# Altium PCB stm8_sensor.PcbDoc
Units mil, origin at the board's own origin, x right, y up, seen from the top; angles counter-clockwise.
Board outline 2362.2 x 2362.2 mil, 2 copper layers (Top Layer, Bottom Layer); 53 components, 30 nets, 149 pads, 40 vias.
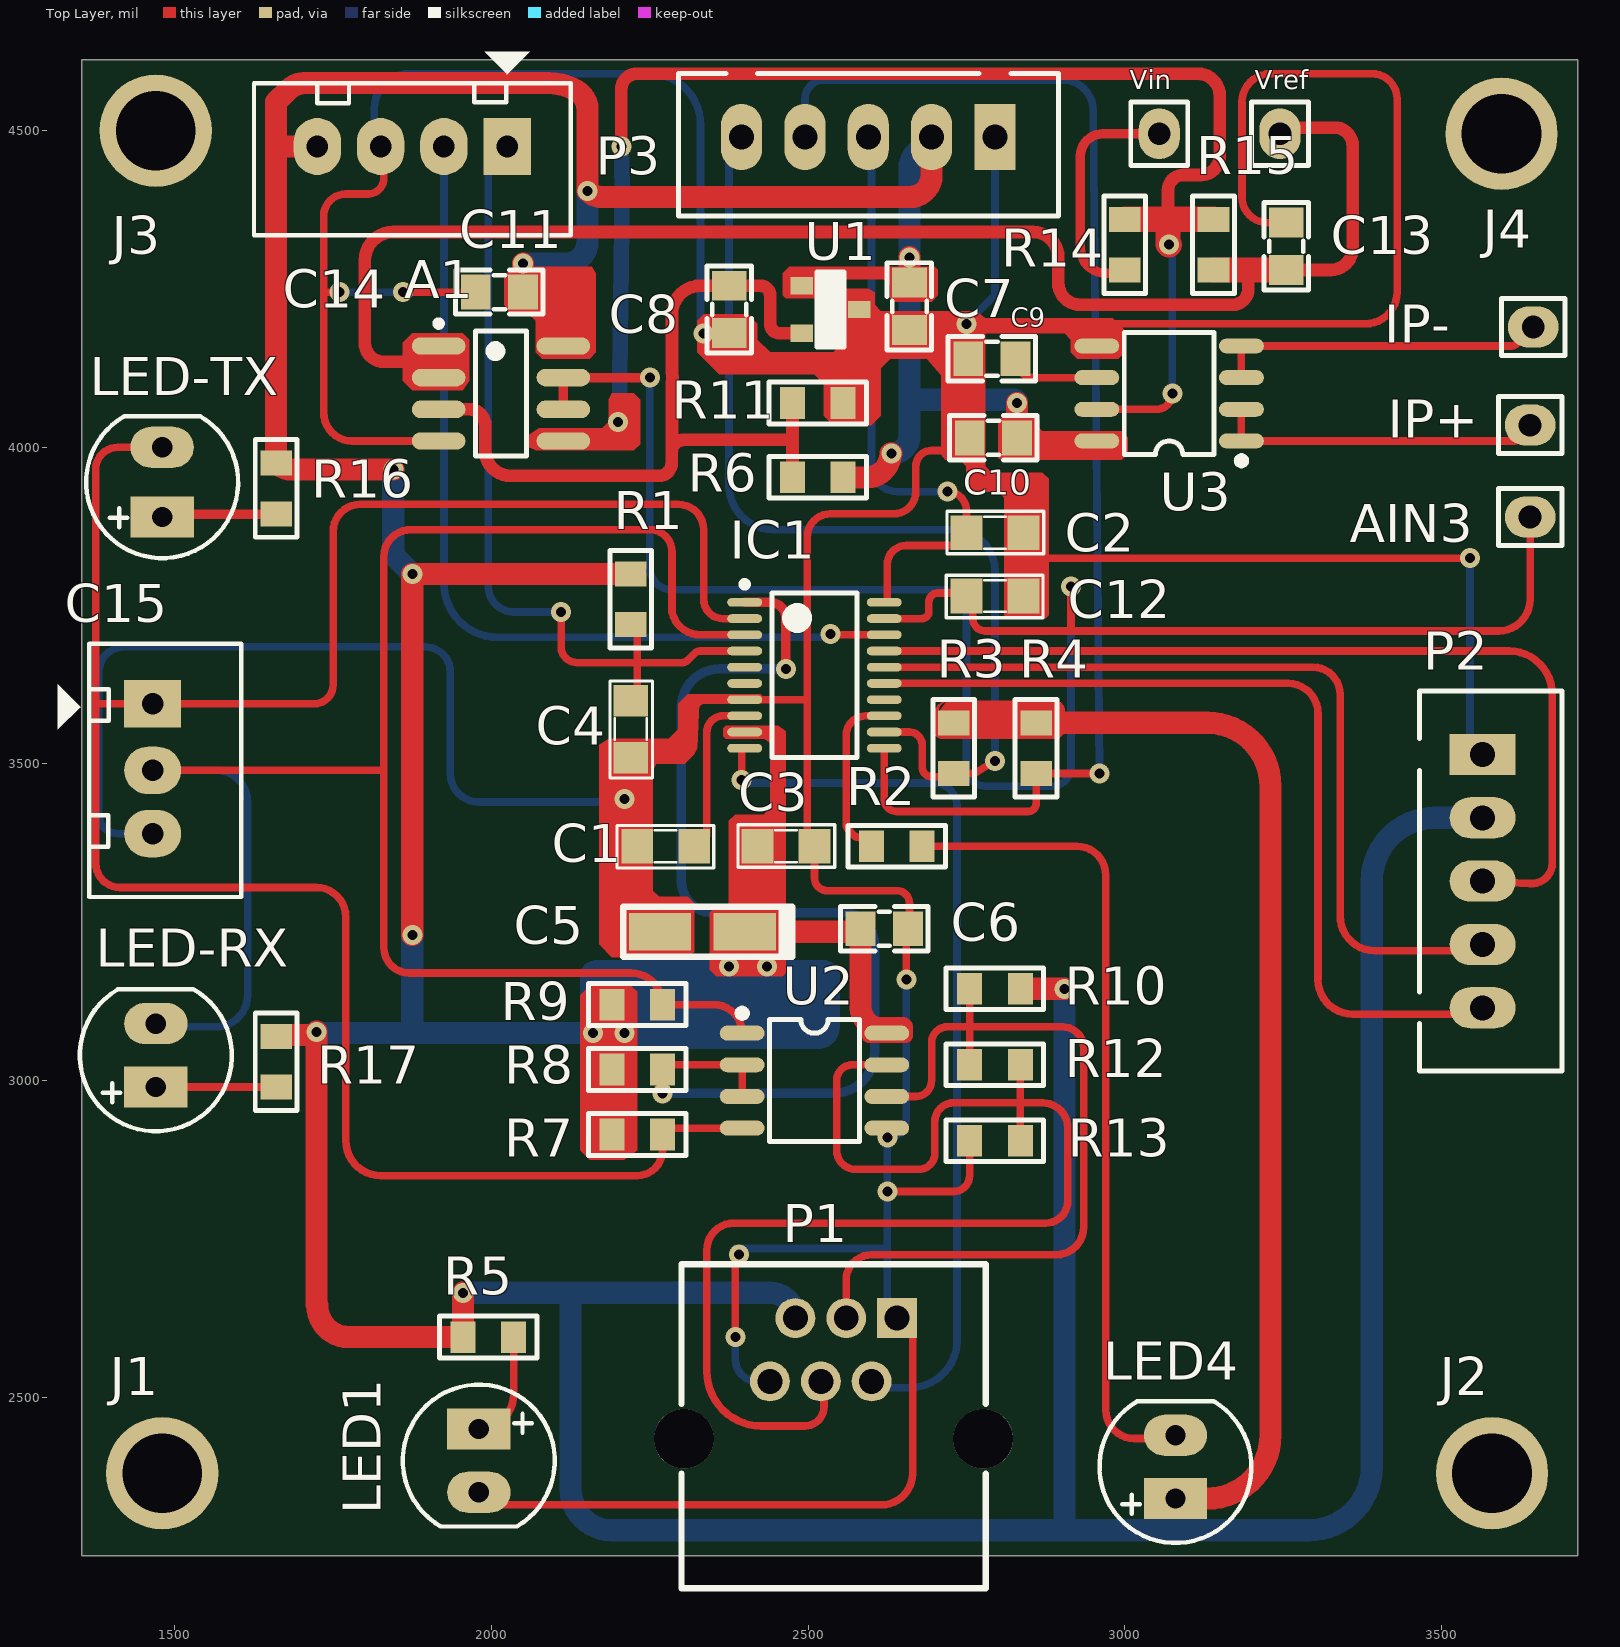
[diagram p0: Top Layer view]
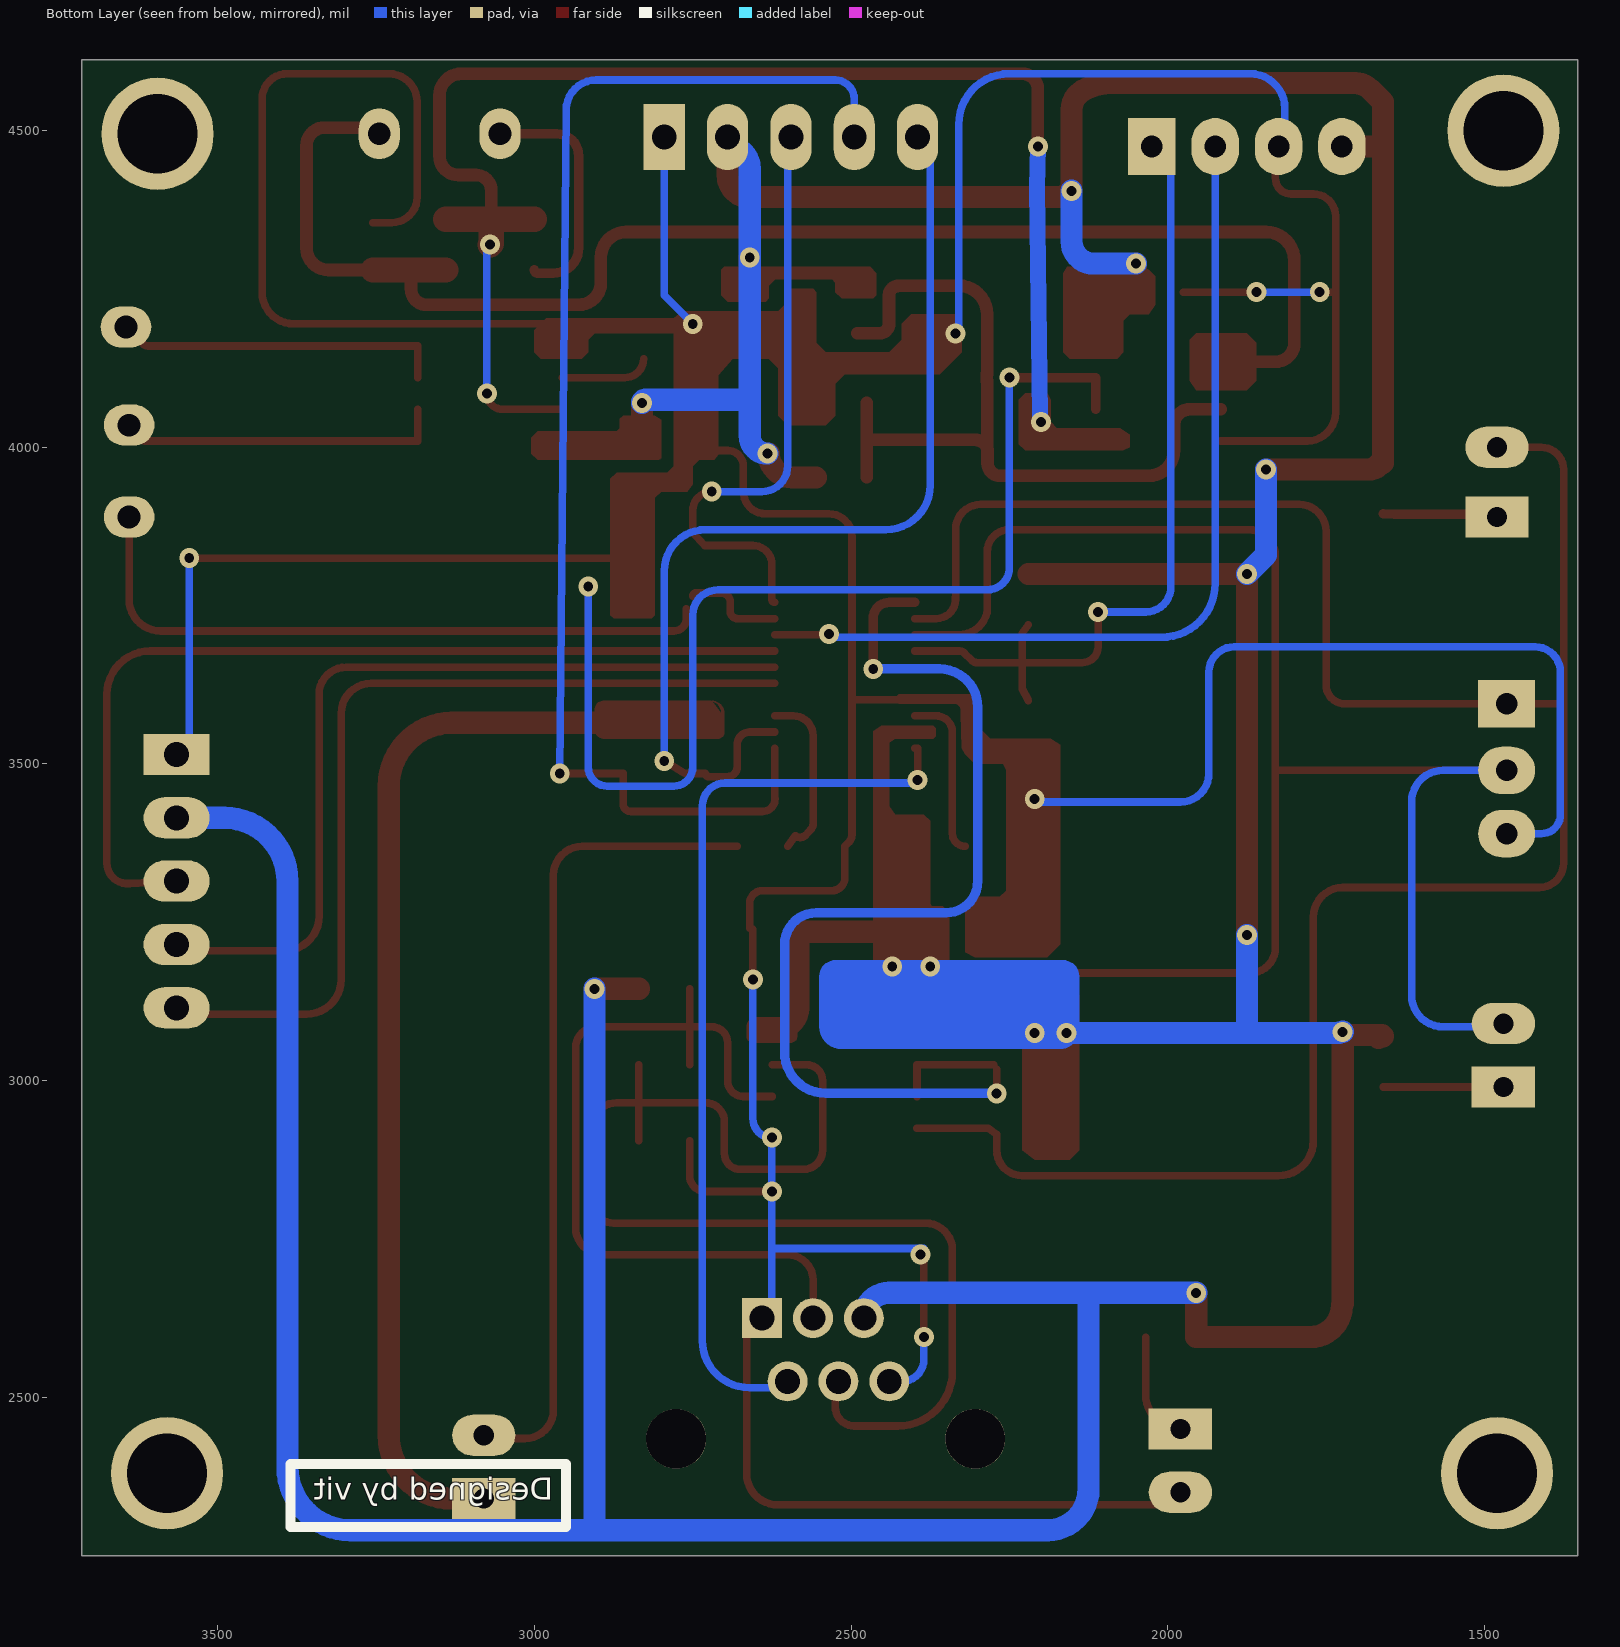
[diagram p1: Bottom Layer view, seen from below]
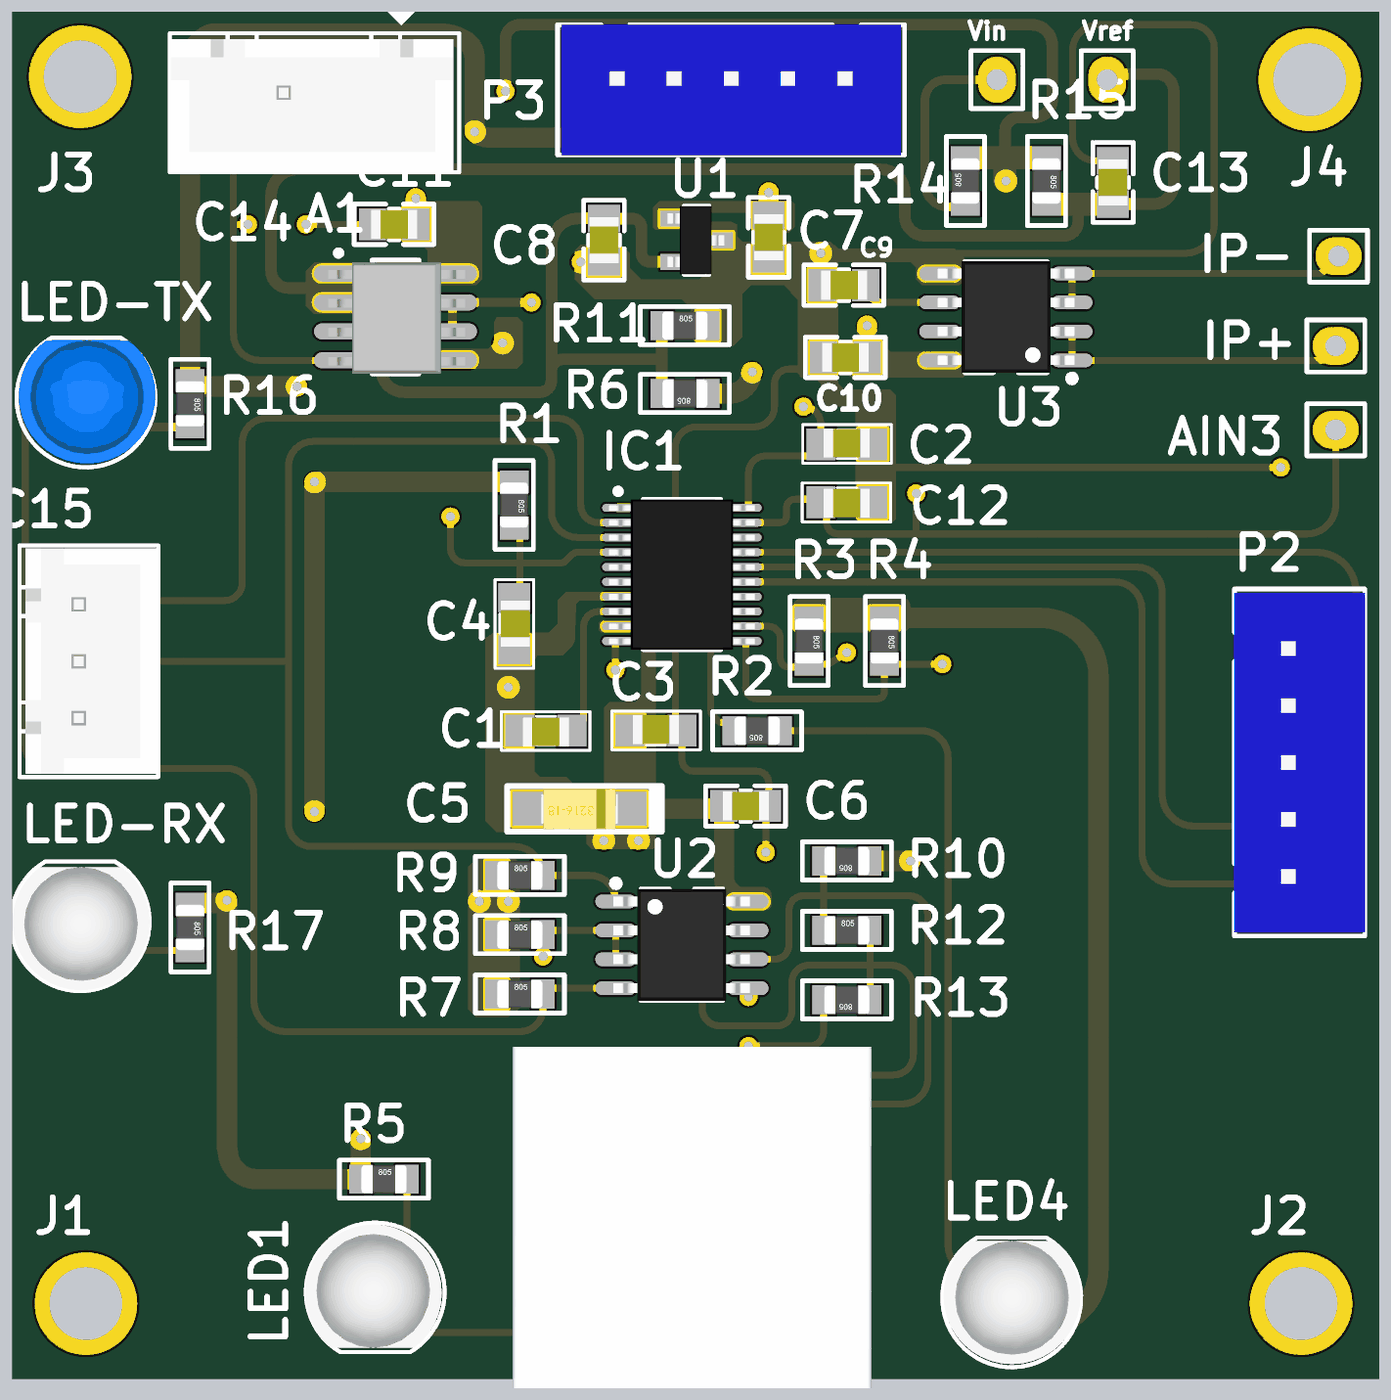
[diagram p2: 3D render of the assembled board from above, using the file's embedded part models]

## Layer stack, top to bottom
Top Solder: solder mask 0.4, Solder Resist, Dk 3.5
Top Layer: signal copper 1.4
Dielectric 1: dielectric 12.6, FR-4, Dk 4.8
Bottom Layer: signal copper 1.4
Bottom Solder: solder mask 0.4, Solder Resist, Dk 3.5

## Board outline
1352.8,2250 1352.8,4612.2 3715,4612.2 3715,2250

## Design rules (kind name [scope] priority, off if disabled: settings)
Clearance [All] p1: gap=10 ignorepadtopadclearanceinfootprint=FALSE
PolygonConnect [All] p1: connectstyle=Relief reliefconductorwidth=10 reliefentries=4 polygonreliefangle="90 Angle" airgapwidth=10
RoutingVias [All] p1: holewidth=15.75 width=31.5 viastyle="Through Hole" minholewidth=15.75 minwidth=31.5 maxholewidth=28 maxwidth=50
SolderMaskExpansion [All] p1: expansion=4 istentingtop=FALSE
Width [All] p1: maxlimit=40 minlimit=12 preferedwidth=12
30 further rules are at their usual default settings.

## Components (designator, comment, footprint, x,y, rotation, side; value= is the part's Value field where it differs from the comment)
A1 "LM358 SOP8" LM358_SOIC 2015,4085 r0 top
AIN3 "Jump1_2.54" jump1_2.54 3655,3800 r90 top
C1 "104" 0805 2275,3370 r0 top value=0.1uF
C2 "104" 0805 2795,3865 r180 top value=0.1uF
C3 "104" 0805 2465,3370 r180 top value=0.1uF
C4 "104" 0805 2220,3555 r90 top value=0.1uF
C5 "100uF-16V" "tu tantalum smd3216" 2333.07,3235 r180 top
C6 "104" "tu 0805" 2620,3240 r0 top
C7 "104" "Tu 0805" 2659.87,4222.43 r90 top
C8 "104" "Tu 0805" 2375.28,4217.6 r90 top
C9 "104" "Tu 0805" 2790,4140 r0 top
C10 "104" "Tu 0805" 2792.43,4015.13 r0 top
C11 "104" "Tu 0805" 2012.43,4245.13 r0 top
C12 "104" 0805 2795,3765 r0 top value=0.1uF
C13 "104" "Tu 0805" 3255.13,4317.57 r270 top
C14 "Header4" Header4 2025,4475 r180 top
C15 "Header3" Header3 1465,3590 r270 top
IC1 "STM8" "TSSOP 20PIN" 2510,3640 r0 top
IP+ "Jump1_2.54" jump1_2.54 3655,3945 r90 top
IP- "Jump1_2.54" jump1_2.54 3660,4100 r90 top
J1 "Pad" Pad_4.5x4.5_hole_3.2mm_no_legend 1480,2380 r0 top
J2 "Pad" Pad_4.5x4.5_hole_3.2mm_no_legend 3580,2380 r0 top
J3 "Pad" Pad_4.5x4.5_hole_3.2mm_no_legend 1470,4500 r0 top
J4 "Pad" Pad_4.5x4.5_hole_3.2mm_no_legend 3595,4495 r0 top
LED1 "LED" LED-5-Yellow 1980,2450 r270 top value="LED 3 ly Single Colour"
LED4 "LED" LED-5-RED 3080,2340 r90 top value="LED 3 ly Single Colour"
LED-RX "LED" LED-5-Green 1470,2990 r90 top value="LED 3 ly Single Colour"
LED-TX "LED" LED-5-BLUE 1480,3945 r90 top value="LED 3 ly Single Colour"
P1 "HI-5501-6P-13MM 无边" RJ11-TH_PCB-6P6C-90 2540.08,2454.14 r0 top
P2 "Connector" JST-XH_B5B-XH-A 3565,3315 r270 top
P3 "Connector" JST-XH_B5B-XH-A 2595,4490 r180 top
R1 "R0805" "DIEN TRO 0805" 2220,3760 r90 top value=0805
R2 "R0805" "DIEN TRO 0805" 2640,3370 r0 top value=10k
R3 "R0805" "DIEN TRO 0805" 2730,3525 r90 top value=10k
R4 "R0805" "DIEN TRO 0805" 2860,3525 r90 top value=10k
R5 "R0805" "DIEN TRO 0805" 1995,2595 r180 top value=0805
R6 "R0805" "DIEN TRO 0805" 2515.28,3952.6 r0 top value=10K
R7 "R0805" "DIEN TRO 0805" 2230,2915 r180 top value=0805-10K
R8 "R0805" "DIEN TRO 0805" 2230,3017.5 r180 top value=0805-10K
R9 "R0805" "DIEN TRO 0805" 2230,3120 r180 top value=0805-10K
R10 "R0805" "DIEN TRO 0805" 2795,3145 r0 top value=0805-10K
R11 "R0805" "DIEN TRO 0805" 2515,4070 r180 top value=10K
R12 "R0805" "DIEN TRO 0805" 2795,3025 r180 top value=0805-120R
R13 "R0805" "DIEN TRO 0805" 2795,2905 r0 top value=0805-10K
R14 "R0805" "DIEN TRO 0805" 3000,4320 r270 top value=20K
R15 "R0805" "DIEN TRO 0805" 3140,4320 r90 top value=10K
R16 "R0805" "DIEN TRO 0805" 1660,3935 r90 top value=0805
R17 "R0805" "DIEN TRO 0805" 1660,3030 r90 top value=0805
U1 "MCP1525T-I/TT" SOT23 2535.28,4217.6 r270 top
U2 "MAX485" SOP8_L 2510,3000 r0 top
U3 "ACS712ELCTR-05B-T" SOP8_L 3070,4085 r180 top
Vin "Jump1_2.54" jump1_2.54 2964.4,4480 r0 top
Vref "Jump1_2.54" jump1_2.54 3335,4510 r180 top

## Footprints (in the part's own frame and the unit in brackets; to place one, negate y for a bottom-side part, rotate by r counter-clockwise, add the part's x,y. Pads: shape width x height; smd on the part's side, far side on the other; paste and mask are expansions set on the pad)
0805 [mil] "Compoment SMD 80x50mil"
  rect 50x55 smd: 1(-45,0) 2(45,0)
  silkscreen extent -77,-34 76,33, body extent -40,-27 40,23, height 24
"DIEN TRO 0805" [mil] "Chip Resistor; Body 2.0 x 1.3 mm (LxW typ)"
  rect 39.37x50 smd: 1(-40,0) 2(40,0)
  silkscreen extent -77,-33 77,33, body extent -39,-25 39,25, height 31
Header3 [mil] "CON 3"
  rect 75x90 hole 34: 1(-5,0)
  oval 75x90 hole 34: 2(100,0) 3(200,0)
  silkscreen extent -100,-150 300,140, body extent -95,-90 295,136, height 276
Header4 [mil] "CON4"
  rect 75x90 hole 34: 1(0,0)
  oval 75x90 hole 34: 2(100,0) 3(200,0) 4(300,0)
  silkscreen extent -100,-150 400,140, body extent -90,-90 398,136, height 276
JST-XH_B5B-XH-A [mm] "JST; XH series; 5 circuit; 2.54 Pitch; Through-hole type; Top entry"
  rect 1.65x2.65 hole 1: 1(-5.08,0)
  oval 1.65x2.65 hole 1: 2(-2.54,0) 3(0,0) 4(2.54,0) 5(5.08,0)
  silkscreen extent -7.62,-2.54 7.62,3.18, body extent -7.45,-2.55 7.45,3.2, height 7
jump1_2.54 [mil]
  oval 65x80 hole 36: 1(90,15)
  silkscreen extent 45,-35 135,65, body extent 35,-40 135,60, height 336
LED-5-BLUE [mil] "LED 2 PIN, 5 ly , Only colour, pin to pin 110mil"
  rect 65x100 hole 32: 1(-55,0)
  oval 65x100 hole 32: 2(55,0)
  silkscreen extent -120,-120 104,120, body extent -113,-120 100,117, height 339
LED-5-Green [mil] "LED 2 PIN, 5 ly , Only colour,pin to pin 100mil"
  rect 65x100 hole 32: 1(0,0)
  oval 65x100 hole 32: 2(100,0)
  silkscreen extent -70,-120 154,120, body extent -69,-120 145,117, height 339
LED-5-RED [mil] "LED 2 PIN, 5 ly , Only colour,pin to pin 100mil"
  rect 65x100 hole 32: 1(0,0)
  oval 65x100 hole 32: 2(100,0)
  silkscreen extent -70,-120 154,120, body extent -65,-119 149,118, height 339
LED-5-Yellow [mil] "LED 2 PIN, 5 ly , Only colour,pin to pin 100mil"
  rect 65x100 hole 32: 1(0,0)
  oval 65x100 hole 32: 2(100,0)
  silkscreen extent -70,-120 154,120, body extent -67,-122 147,115, height 339
LM358_SOIC [mm] "SOIC, 8-Leads, Body 5.00x3.90mm, Pitch 1.27mm, IPC Medium Density"
  oval 2.15x0.7 smd: 1(-2.5,1.905) 2(-2.5,0.635) 3(-2.5,-0.635) 4(-2.5,-1.905) 5(2.5,-1.905) 6(2.5,-0.635) 7(2.5,0.635) 8(2.5,1.905)
  silkscreen extent -2.62,-2.5 1.02,2.93, body extent -4.15,-5.42 3.05,2.41, height 1.75
Pad_4.5x4.5_hole_3.2mm_no_legend [mm]
  round 4.5 hole 3.2: 1(0,0)
RJ11-TH_PCB-6P6C-90 [mm]
  rect 1.6x1.6 hole 1: 1(2.55,4.34)
  round 1.6 hole 1: 2(1.53,1.8) 3(0.51,4.34) 4(-0.51,1.8) 5(-1.53,4.34) 6(-2.55,1.8)
  round 2.4 hole 2.4 unplated: ""(-6,-0.5) ""(6,-0.5)
  silkscreen extent -6.1,-6.5 6.1,6.5, body extent -8.25,-5.59 7.56,9.4, height 12.6
SOP8_L [mm] "SOIC, 8-Leads, Body 4.9x3.9mm, Pitch 1.27mm, IPC High Density"
  oval 1.8x0.6 smd: 1(-2.9,1.905) 2(-2.9,0.635) 3(-2.9,-0.635) 4(-2.9,-1.905) 5(2.9,-1.905) 6(2.9,-0.635) 7(2.9,0.635) 8(2.9,1.905)
  silkscreen extent -3.2,-2.44 1.8,3, body extent -3.01,-2.45 2.99,2.45, height 1.75
SOT23 [mm] "SOT 23 _ 1-3-2"
  rect 0.7x0.9 smd: 1(-0.95,-1.15) 2(0.95,-1.15) 3(0,1.15)
  silkscreen extent -1.5,-0.55 1.5,0.55, body extent -1.5,-1.28 1.5,1.22, height 1.06
"TSSOP 20PIN" [mm] "TSOP, 20-Leads, Body 6.6x4.5mm (max), Pitch 0.65mm, IPC High Density"
  oval 1.4x0.35 smd: 1(-2.8,2.925) 2(-2.8,2.275) 3(-2.8,1.625) 4(-2.8,0.975) 5(-2.8,0.325) 6(-2.8,-0.325) 7(-2.8,-0.975) 8(-2.8,-1.625) 9(-2.8,-2.275) 10(-2.8,-2.925) 11(2.8,-2.925) 12(2.8,-2.275) 13(2.8,-1.625) 14(2.8,-0.975) 15(2.8,-0.325) 16(2.8,0.325) 17(2.8,0.975) 18(2.8,1.625) 19(2.8,2.275) 20(2.8,2.925)
  silkscreen extent -2.92,-3.3 1.7,3.77, body extent -3.2,-3.3 3.2,3.3, height 1.1
"tu 0805" [mm] "Compoment SMD 80x50mil"
  rect 1.2x1.4 smd: 1(-0.946,-0.003) 2(0.954,-0.003)
  silkscreen extent -1.75,-0.89 1.75,0.89, body extent -1.01,-0.64 1.01,0.63, height 0.61
"Tu 0805" [mm] "Compoment SMD 80x50mil"
  rect 1.2x1.4 smd: 1(-0.946,-0.003) 2(0.954,-0.003)
  silkscreen extent -1.75,-0.89 1.75,0.89, body extent -1.01,-0.64 1.01,0.63, height 0.61
"tu tantalum smd3216" [mm]
  rect 2.5x1.5 smd: 1(-1.7,0) 2(1.7,0)
  silkscreen extent -3.61,-1 3.17,1, body extent -1.7,-0.9 1.7,0.9, height 1.69

## Part data
A1: library part LM358, "Dán", Chung_Loai=Dán, Don_Vi=Con, Ma_Hang=MH000609, Ten_Linh_Kien="LM358 SOP8"
AIN3 IP+ IP- Vin Vref: library part jump_1
C1 C2 C3 C4 C12: library part "Cap 104_SMD", "Capacitor (Semiconductor SIM Model)", LatestRevisionDate=17-Jul-2002, LatestRevisionNote="Re-released for DXP Platform.", PackageReference=C1206, Published=8-Jun-2000, Publisher="Altium Limited"
C5: library part "Tu tantalum 1uF 35V SMD3216", "Dán", Chung_Loai=Dán, Don_Vi=Con, Ma_Hang=MH007471, So_Chan=2, Ten_Linh_Kien="Tụ tantalum 105V-1uF 35V SMD3216"
C6: library part "Tu 0805 104 50V 10%", "Dán", Chung_Loai=Dán, Don_Vi=Con, Ma_Hang=MH004551, So_Chan=2, Ten_Linh_Kien="Tụ 0805 104-100nF 10% 50V"
C7 C8 C9 C10 C11 C13: library part "Tu 104", "Dán", Chung_Loai=Dán, Don_Vi=Con, Ma_Hang=MH004551, Ten_Linh_Kien="Tụ 0805 104-100nF 10% 50V"
C14: "Header IDC, 4 x 1 Pin Vertical 2.54mm Pitch (Non-Boxed, Male)", Manufacturer="W¨¹rth Elektronik eiSos GmbH", partNo=613002143121, ComponentLink1 Description=Manufacturer, ComponentLink1URL=http://www.we-online.com, ComponentLink2 Description=Datasheet, ComponentLink2URL=http://katalog.we-online.de/em/datasheet/6130xx143121.pdf, Created by="Karrer Zheng", Created Date="29 March 2013", NoPins=02
C15: "Header IDC, 3 x 1 Pin Vertical 2.54mm Pitch (Non-Boxed, Male)", Manufacturer="W¨¹rth Elektronik eiSos GmbH", partNo=613002143121, ComponentLink1 Description=Manufacturer, ComponentLink1URL=http://www.we-online.com, ComponentLink2 Description=Datasheet, ComponentLink2URL=http://katalog.we-online.de/em/datasheet/6130xx143121.pdf, Created by="Karrer Zheng", Created Date="29 March 2013", NoPins=02
IC1: library part STM8S103F3_20P, "STM32 ARM MCU"
J1 J2 J3 J4: PackageDocument=20-Nov-2001, ComponentLink1Description="Manufacturer Link", ComponentLink1URL=http://www.molex.com/, ComponentLink2Description=Datasheet, ComponentLink2URL=http://www.molex.com/cmc_upload/common_files/1212003_42878catalogpage.pdf, DatasheetDocument=20-Nov-2001, DrillSize="Nominal, Rounded to nearest 0.05mm", PackageReference=42878-4410, PCB_Layout="Complies with Manufacturer's Recommendation.", PCB_Mounting=Thru-Hole, PCB_Thickness="0.125\"", PerformanceCategory=3, Ports=1, Positions/Loaded="Port1 - 4/2", Published=25-Jun-2002, Publisher="Altium Limited"
LED1 LED4 LED-RX LED-TX: "LED Single colour Green and Red"
P2 P3: library part Connector_5pin
R1 R2 R3 R4 R5 R6 R7 R8 R9 R10 R11 R12 R13 R14 R15 R16 R17: "Resistor SMD 0805", LatestRevisionDate=17-Jul-2002, LatestRevisionNote="Re-released for DXP Platform.", PackageReference=AXIAL-0.4, Published=8-Jun-2000, Publisher="Altium Limited"
U1: library part MCP1525T, "2.5V And 4.096V Voltage References"
U3: "SENSOR CURRENT HALL 5A AC/DC"

## Via types
v1: diameter 31.5, hole 15.75, Top Layer to Bottom Layer, 40 vias

## Nets (pads, with @x,y where several pads share a name; then routed paths per layer and width w, separated by ;. In a path a pad name is that pad's centre, name@x,y a point inside that pad or via, vN(x,y) a via of type N, cw(c..) or ccw(c..) an arc to the next point about the centre after c; other vN are vias at no path point)
485-A: P1.3 R10.1 R12.2 U2.6 | length 1304.3
  Top Layer w12: P1.3 2560,2625 2560,2685 cw(c2600,2685) 2600,2725 2891.39,2725 ccw(c2891.39,2768.61) 2935,2768.61 2935,3051.61 ccw(c2901.61,3051.61) 2901.61,3085 2755,3085 ; U2.6 2670,2975 ccw(c2670,3000) 2695,3000 2695,3060 cw(c2720,3060) 2720,3085 2755,3085 ; R12.2 2755,3085 ; R10.1 2755,3085
485-B: P1.4 R12.1 R13.2 U2.7 | length 2024.9
  Top Layer w12: P1.4 cw(c2520,2520) 2525,2520 2525,2485 cw(c2494.69,2485) 2494.69,2454.69 2426.4,2454.69 cw(c2426.4,2541.08) 2340,2541.08 2340,2732.4 cw(c2382.6,2732.4) 2382.6,2775 2875,2775 ccw(c2875,2810) 2910,2810 2910,2925 ccw(c2870,2925) 2870,2965 2835,2965 ; U2.7 2570,3025 ccw(c2570,3000) 2545,3000 2545,2890 ccw(c2575,2890) 2575,2860 2675,2860 ccw(c2675,2885) 2700,2885 2700,2935 cw(c2730,2935) 2730,2965 2835,2965 ; R13.2 2835,2965 ; R12.1 2835,2965
485-DE: IC1.1 R8.1 U2.2 U2.3 | length 1746.4
  Top Layer w12: v1(2270,2980) R8.1 ; R8.1@2275,3025 U2.2 U2.3
  Top Layer w15: IC1.1 2439.84,3755.16 cw(c2439.84,3730) 2465,3730 v1(2465,3650)
  Bottom Layer w15: v1(2270,2980) 2540,2980 ccw(c2540,3045) 2605,3045 2605,3215 ccw(c2555,3215) 2555,3265 2350,3265 cw(c2350,3315) 2300,3315 2300,3590 cw(c2360,3590) 2360,3650 v1(2465,3650)
+2.5V: A1.3 C8.2 R6.1 R11.2 U1.2 | length 1301.2
  Top Layer w20: A1.3 1965,4060 cw(c1965,4035) 1990,4035 1990,3995 ccw(c2030,3995) 2030,3955 2220.38,3955 2264.49,3955 ccw(c2264.49,3975) 2284.49,3975 2284.49,3996.28 ; R11.2 2475.28,4070 2475.28,4011.81 ; R6.1 2475.28,4011.3 2475.28,4011.81 ; U1.2 2455,4180.2 2455,4180 cw(c2455,4195) 2440,4195 2440,4240 ccw(c2425,4240) 2425,4255 2375.41,4255 C8.2 2330.17,4255.17 ccw(c2330.17,4210) 2285,4210 2285,4119.04 ccw(c2305,4119.1) 2285.25,4115.94 cw(c2250,4110) 2285.27,4104.19 ccw(c2305,4100.9) 2285,4100.96 2285,4000.7 cw(c2265,4000.77) 2284.5,3996.34 2284.49,3996.28 ; 2284.49,3996.28 2285,3996.28 2285,3998.78 2286.44,4001.41 cw(c2303.99,3991.82) 2295,4009.68 cw(c2303.99,3991.82) 2304.26,4011.81 2475.28,4011.81
+5V: A1.8 C3.2 C5.1 C6.1 C7.2 C10.2 C11.2 C14.4 IC1.9 LED4.1 P1.5 P2.2 P3.2 R1.2 R3.2 R4.2 R5.2 R6.2 R7.2 R8.2 R9.2 R10.2 R16.2 R17.2 U1.1 U2.8 U3.8 | length 12250.2
  Top Layer w35: R17.2@1667.43,3067.81 R17.2 1662.19,3072.19 1718.85,3072.19 v1(1723.73,3077.07) 1723.73,2648.07 ccw(c1728.07,2648.07) 1725,2645 ccw(c1775,2645) 1775,2595 R5.2 v1(1955,2665) ; C14.4@1719.46,4469.46 cw(c1738.81,4449.92) 1725,4473.7 C14.4 1660,4475 ; v1(1845,3965) 1684.41,3965 cw(c1684.49,4000) 1668.81,3968.71 1667.5,3972.81 R16.2 1660,4475 ; v1(1875,3230) v1(1875,3800) R1.2 ; C11.2 v1(2050,4290) ; v1(2160,3075) R9.2 cw(c2190,3100) 2210,3100 v1(2210,3075) ; C5.1 2577.91,3235 ccw(c2577.91,3239.87) C6.1 2582.77,3114.92 ccw(c2617.73,3116.59) 2606.75,3083.35 U2.8@2612.69,3081.39 ; R6.2 2592.6,3952.6 ccw(c2592.6,3990) 2630,3990 v1(2631.75,3990) ; C7.2 v1(2660,4300) ; P3.2 2695,4430 cw(c2660,4430) 2660.08,4395 2176.16,4395 cw(c2176.24,4430) v1(2151.75,4405) 2151.75,4532.94 ccw(c2116.75,4532.85) 2134.49,4563.02 ccw(c2090.5,4488.23) 2090.5,4575 1704.5,4575 ccw(c1704.5,4540) 1679.75,4564.75 1660,4545 1660,4475 ; C10.2 v1(2830,4070) ; R10.2 v1(2905,3145) ; R4.2 2924.99,3565 3130,3565 cw(c3130,3465) 3230,3465 3230,2440 cw(c3130,2440) 3130,2340 LED4.1
  Bottom Layer w35: v1(1723.73,3077.07) ccw(c1735.59,3110) 1735.59,3075 1870,3075 ; v1(1845,3965) 1845,3830 v1(1875,3800) ; v1(1875,3230) 1875,3080 1870,3075 ; v1(1955,2665) 2125,2665 ; v1(2050,4290) 2116.75,4290 ccw(c2116.75,4325) 2151.75,4325 v1(2151.75,4405) ; v1(2160,3075) 1870,3075 ; P1.5 ccw(c2439.84,2625) 2439.84,2665 2125,2665 ; v1(2631.75,3990) ccw(c2631.75,4018.25) 2660,4018.25 2660,4075 ; P3.2 2670.25,4465.25 ccw(c2695,4440.5) 2660,4440.5 v1(2660,4300) 2660,4075 ; v1(2830,4070) ccw(c2825,4070) 2825,4075 2660,4075 ; v1(2905,3145) 2905,2290 ; LED4.1 3080,2290 ; P2.2 3490,3415 ccw(c3490,3315) 3390,3315 3390,2390 cw(c3290,2390) 3290,2290 3080,2290 ; 2125,2665 2125,2355 ccw(c2190,2355) 2190,2290 2905,2290 ; 2905,2290 3080,2290
  other v1: 2375,3180 2435,3180
AIN3: A1.6 A1.7 AIN3.1 C12.1 IC1.19 | length 3067.7
  Top Layer w12: IC1.19 2679.16,3729.57 ccw(c2679.11,3741.57) 2690.71,3738.5 2690.71,3755.71 cw(c2705,3755.71) 2705,3770 C12.1@2735,3770 ; C12.1@2760,3745 2760,3730 ccw(c2780,3730) 2780,3710 2915,3710 ; v1(2915,3780) 2915,3710 ; AIN3.1 3640,3760 cw(c3590,3760) 3590,3710 2915,3710 ; C12.1@2735,3770 2740,3770 2745,3770 cw(c2745,3765) C12.1 2745,3765 2740,3765 C12.1@2735,3770
  Top Layer w15: A1.6 A1.7 v1(2250,4110)
  Bottom Layer w12: v1(2250,4110) 2250,3810 ccw(c2285,3810) 2285,3775 2324.15,3775 2710,3775 cw(c2710,3735) 2750,3735 2750,3495 ccw(c2780,3495) 2780,3465 2884.67,3465 2884.72,3465 ccw(c2884.71,3495.29) 2915,3495.29 v1(2915,3780)
AIN4: C2.2 IC1.20 P3.3 | length 964.6
  Top Layer w12: IC1.20 ccw(c2620.24,3759.92) 2625,3759.92 2625,3815 cw(c2655,3815) 2655,3845 2731,3845 C2.2 2750,3900 ccw(c2720,3900) v1(2720,3930) v1@2722.85,3932.62
  Bottom Layer w12: P3.3 cw(c2595,4485) 2600,4485 2600,3970.87 ccw(c2640.87,3970.87) 2640.87,3930 v1(2720,3930)
GND: A1.4 C1.1 C2.1 C3.1 C4.1 C5.2 C6.2 C7.1 C8.1 C9.1 C10.1 C11.1 C12.2 C13.1 C14.3 C15.3 IC1.7 LED1.2 P1.1 P1.6 P2.1 P3.1 R11.1 R13.1 U1.3 U2.5 U3.5 | length 10219.8
  Top Layer w12: v1(1760,4245) 1735,4245 ; C14.3 cw(c1825,4470) 1830,4470 1830,4425 cw(c1805,4425) 1805,4400 1770,4400 ccw(c1770,4365) 1735,4365 1735,4245 ; v1(1860,4245) C11.1 ; A1.4 1780,4010 cw(c1780,4055) 1735,4055 1735,4245 ; LED1.2 ccw(c2000,2350) 2000,2330 2615,2330 ccw(c2615,2380) 2665,2380 2665,2600.47 ccw(c2640.47,2600.47) P1.1 ; v1(2210,3445) 2210,3500 cw(c2220,3500) C4.1 2295.03,3510 ccw(c2295.03,3522) 2303.49,3513.49 2311.53,3521.53 ccw(c2303,3529.97) 2315,3529.97 2315,3580.08 cw(c2327,3580.03) 2318.47,3588.47 2328.13,3598.13 cw(c2336.58,3589.61) 2336.54,3601.61 ; v1(2335,4180) 2335,4180.37 C8.1 ; 2336.58,3601.61 IC1.7 2496.89,3601.61 cw(c2496.89,3600) 2498.51,3600 ; v1(2385,2595) 2385,2720.2 cw(c2390.52,2720.2) v1(2390.52,2725.72) ; v1(2625,2825) 2730,2825 ccw(c2730,2850) 2755,2850 R13.1 ; v1(2655,3160) 2655,3237.29 cw(c2657.57,3237.29) C6.2 ccw(c2657.57,3242.29) 2660,3242.29 2660,3280 ccw(c2640,3280) 2640,3300 2530,3300 cw(c2530,3320) 2510,3320 C3.1 2503.51,3376.49 cw(c2515.6,3388.57) 2498.51,3388.57 2498.51,3600 ; C9.1 2750,4142.64 v1(2750,4195) 2930.86,4195 cw(c2930.86,4160.86) 2955,4185 cw(c2953,4183) 2955.83,4183 U3.5 cw(c2995.79,4160) 2973.06,4192.87 cw(c2979.89,4183) 2979.84,4195 3380,4195 ccw(c3380,4245) 3430,4245 3430,4550 ccw(c3390,4550) 3390,4590 3230,4590 ccw(c3230,4545) 3185,4545 3185,4395 ccw(c3225.2,4395) 3225.2,4354.8 C13.1 ; C10.1 cw(c2735.2,4015) 2735.2,3995 2695,3995 ccw(c2695,3970) 2670,3970 2670,3930 cw(c2635,3930) 2635,3895 2535,3895 ccw(c2535,3858.51) 2498.51,3858.51 2498.51,3600 ; 2840,3825 v1(3545,3825)
  Bottom Layer w12: C15.3 1410,3390 cw(c1410,3420) 1380,3420 1380,3645 cw(c1420,3645) 1420,3685 1895,3685 cw(c1895,3645) 1935,3645 1935,3485 ccw(c1980,3485) 1980,3440 2205,3440 ccw(c2205,3445) v1(2210,3445) ; v1(1760,4245) v1(1860,4245) ; C14.3 cw(c1825,4485) 1815,4485 1815,4535 cw(c1870,4535) 1870,4590 2250,4590 cw(c2250,4510) 2330,4510 2330,4185 ccw(c2335,4185) v1(2335,4180) ; v1(2385,2595) 2385,2560 ccw(c2420,2560) 2420,2525 P1.6 ; v1(2390.52,2725.72) 2390.52,2729.48 2385,2735 2617.98,2735 cw(c2617.98,2723) 2624.99,2732.74 ; P1.1 cw(c2640.47,2640.47) 2625,2640.47 2625,2732.74 ; v1(2655,3160) 2655,2940 cw(c2625,2940) v1(2625,2910) v1(2625,2825) 2625,2732.74 ; v1(2750,4195) 2795,4240 P3.1 ; v1(3545,3825) 3545,3535 ccw(c3565,3535) P2.1
LED: IC1.13 R2.1 | length 277.8
  Top Layer w12: R2.1@2588.02,3386.63 2587.74,3386.41 cw(c2580.5,3395.98) 2571.75,3387.76 2563.22,3396.91 cw(c2572,3405.09) 2560,3405.09 2560,3545 cw(c2591.02,3545) 2591.02,3576.02 IC1.13 ; R2.1@2588.03,3386.62 R2.1
MISO: IC1.17 P2.3 | length 1488.9
  Top Layer w12: IC1.17 3606.61,3678.39 cw(c3606.61,3610) 3675,3610 3675,3343.43 cw(c3642.69,3343.43) 3639.67,3311.27 ccw(c3638.6,3299.31) 3639.2,3311.3 P2.3
MOSI: IC1.16 P2.4 | length 1356.3
  Top Layer w12: IC1.16 2640.91,3652.8 2820.79,3652.8 3297.2,3652.8 cw(c3297.2,3610) 3340,3610 3340,3260 ccw(c3395,3260) 3395,3205 3555,3205 ccw(c3555,3215) P2.4
NetC1_2: C1.2 IC1.8 | length 266
  Top Layer w12: C1.2 ccw(c2320,3390) 2340,3390 2340,3550 cw(c2366.02,3550) 2366.02,3576.02 IC1.8
NetC9_2: C9.2 U3.6 | length 145.3
  Top Layer w12: C9.2 ccw(c2857.44,4139.87) 2857.44,4110 U3.6
NetIP+_1: IP+.1 U3.1 U3.2 | length 520.1
  Top Layer w12: U3.2 U3.1 3615,4010 ccw(c3615,4035) IP+.1
NetIP-_1: IP-.1 U3.3 U3.4 | length 522.7
  Top Layer w12: U3.3 U3.4 3610.03,4160 ccw(c3610.03,4172) 3618.51,4163.51 IP-.1
NetLED1_1: LED1.1 R5.1 | length 176.4
  Top Layer w12: LED1.1 ccw(c1980,2505) 2035,2505 R5.1
NetLED4_2: LED4.2 R2.2 | length 1299
  Top Layer w12: R2.2 2924.39,3370 cw(c2924.39,3324.39) 2970,3324.39 2970,2480 ccw(c3015,2480) 3015,2435 3075,2435 ccw(c3075,2440) LED4.2
NetLED-RX_1: LED-RX.1 R17.1 | length 190
  Top Layer w12: LED-RX.1 R17.1
NetLED-TX_1: LED-TX.1 R16.1 | length 180.2
  Top Layer w15: LED-TX.1 1522.5,3894.51 1642.5,3894.51 R16.1
NetR14_2: R14.2 Vin.1 | length 385.1
  Top Layer w15: R14.2 cw(c2995,4280) 2995,4275 2970,4275 cw(c2970,4315) 2930,4315 2930,4460 cw(c2965,4460) 2965,4495 Vin.1
NRST: C4.2 C14.1 IC1.4 R1.1 | length 1336.6
  Top Layer w12: v1(2110,3740) 2110,3685 ccw(c2135,3685) 2135,3660 2230,3660 ; C4.2 2230,3619 2230,3660 ; R1.1 2230,3706.31 2230,3660 ; 2329.37,3678.39 ccw(c2329.42,3666.39) 2320.96,3674.9 2309.55,3663.49 cw(c2301.09,3672) 2301.09,3660 2230,3660 ; 2329.42,3678.39 IC1.4
  Bottom Layer w12: C14.1 1995,4445 1995,3780 ccw(c2035,3780) 2035,3740 v1(2110,3740)
PA3: IC1.10 P1.2 | length 1443.3
  Top Layer w12: v1(2395,3475) 2395,3524.84 IC1.10
  Bottom Layer w12: v1@2395.16,3475.19 ccw(c2409.82,3492.09) 2412.67,3469.9 ; 2412.69,3469.9 cw(c2414.2,3458) 2414.15,3470 2698.44,3470 cw(c2698.46,3458) 2698.51,3470 2698.57,3470 cw(c2698.49,3433.49) 2735,3433.49 2735,2590 cw(c2660,2590) 2660,2515 2610.31,2515 cw(c2610.31,2525) P1.2
RX: C15.2 IC1.3 LED-RX.2 R9.1 U2.1 | length 3009.4
  Top Layer w12: C15.2 1825,3490 cw(c1825,3485) 1830,3485 ; R9.1 ccw(c2220,3120) 2220,3170 1870,3170 cw(c1870,3210) 1830,3210 1830,3485 ; R9.1@2275,3120 2350.83,3120 cw(c2350.83,3075) U2.1 ; 2329.7,3703.98 cw(c2329.78,3749.73) 2285.32,3738.92 cw(c2297,3741.69) 2285,3741.61 2285,3835 ccw(c2250,3835) 2250,3870 1872.64,3870 ccw(c1872.64,3827.36) 1830,3827.36 1830,3490 1830,3485 ; 2329.75,3703.98 IC1.3
  Bottom Layer w12: C15.2 1565,3490 cw(c1565,3440) 1615,3440 1615,3135 cw(c1565,3135) 1565,3085 1475,3085 cw(c1475,3090) LED-RX.2
SCK: IC1.15 P2.5 | length 1428.8
  Top Layer w12: IC1.15 3257.8,3627.2 cw(c3257.8,3580) 3305,3580 3305,3160 ccw(c3360,3160) 3360,3105 3555,3105 ccw(c3555,3115) P2.5
SCL: IC1.12 P3.5 R3.1 | length 1596.7
  Top Layer w12: IC1.12 2659.57,3550.43 cw(c2659.57,3530) 2680,3530 2680,3495 ccw(c2695,3495) 2695,3480 2725,3480 ccw(c2725,3485) R3.1 2759.39,3485 ccw(c2759.39,3497) 2765.73,3486.81 v1(2795,3505)
  Bottom Layer w12: P3.5 ccw(c2395,4470) 2375,4470 2375,3940 ccw(c2445,3940) 2445,3870 2729.67,3870 cw(c2729.67,3804.67) 2795,3804.78 v1(2795,3505)
SDA: IC1.11 P3.4 R4.1 | length 2092.9
  Top Layer w12: IC1.11 2620.24,3445 2620,3445 ccw(c2640,3445) 2640,3425 2847.24,3425 ; 2847.29,3425 ccw(c2847.51,3437.6) 2857.93,3430.52 ccw(c2848,3437.25) 2860,3437.25 R4.1 v1(2960,3485)
  Bottom Layer w12: P3.4 2495,4550 cw(c2525,4550) 2525,4580 2902.3,4580 cw(c2902.3,4532.3) 2950,4532.35 cw(c2902.3,4532.3) 2950,4532.3 v1(2960,3485)
SWIM: C14.2 IC1.18 | length 1436
  Top Layer w12: v1(2535,3705) ccw(c2536.02,3705) 2536.02,3703.98 IC1.18
  Bottom Layer w12: C14.2 1925,3785 ccw(c2010,3785) 2010,3700 2525.25,3700 ccw(c2525.25,3712) v1(2535,3705)
TX: C15.1 IC1.2 LED-TX.2 R7.1 U2.4 | length 3710.3
  Top Layer w12: LED-TX.2 1410,4000 ccw(c1410,3965) 1375,3965 1375,3595 ; U2.4 2283.69,2925 R7.1 2270,2890 cw(c2230,2890) 2230,2850 1825.18,2850 cw(c1825.18,2905.18) 1770,2905.18 1770,3258.37 ccw(c1723.37,3258.37) 1723.37,3305 1413.51,3305 cw(c1413.51,3343.51) 1375,3343.51 1375,3595 ; IC1.2 2365.57,3729.57 cw(c2365.51,3759.99) 2335.08,3759.85 2335,3770 2335,3870 ccw(c2295,3870) 2295,3910 1792.73,3910 ccw(c1792.73,3867.27) 1750,3867.27 1750,3625 cw(c1720,3625) 1720,3595 C15.1 1375,3595
VOL: A1.5 R14.1 R15.2 U3.7 | length 2422.4
  Top Layer w12: A1.5 2180,4010 ccw(c2180,4035) 2203.62,4026.82 ccw(c2192.28,4030.75) 2200.74,4039.26 v1(2200,4040) ; U3.7 3050,4060 ccw(c3050,4085) v1(3075,4085)
  Top Layer w20: v1(2205,4475) 2205,4530.75 2205,4565 cw(c2230,4565) 2230,4590 3115,4590 cw(c3115,4555) 3150,4555 3150,4460 cw(c3120,4460) 3120,4430 3092.29,4430 ccw(c3092.29,4406) 3068.29,4406 3068.29,4360
  Top Layer w40: R14.1 3068.29,4360 ; v1(3070,4320) cw(c3070,4321.71) 3068.29,4321.71 3068.29,4360 ; R15.2 3068.29,4360
  Bottom Layer w12: v1(3070,4320) cw(c3070,4315) 3075,4315 v1(3075,4085)
  Bottom Layer w25: v1(2200,4040) ccw(c2176.81,4049.33) 2201.81,4049.01 2206.48,4409.25 ccw(c2181.49,4409.58) 2206.48,4410.15 v1(2205,4475)
Vref: A1.1 A1.2 C13.2 R15.1 Vref.1 | length 2354.4
  Top Layer w20: 1920,4135 1830,4135 cw(c1830,4165) 1800,4165 1800,4295 cw(c1845,4295) 1845,4340 2855,4340 cw(c2855,4300) 2895,4300 2895,4260 ccw(c2930,4260) 2930,4225 3170,4225 ccw(c3170,4250) 3195,4250 3195,4277.5 cw(c3197.5,4277.5) 3197.5,4280 3195,4280 ; C13.2 3325,4280 ccw(c3325,4315) 3360,4315 3360,4475.59 ccw(c3330.34,4475.59) 3335.9,4504.72 3254.72,4504.72 ccw(c3254.72,4495) Vref.1@3245,4495.09 ; Vref.1@3245,4495.09 ccw(c3254.72,4495) Vref.1 Vref.1@3245,4495.09
  Top Layer w40: R15.1 3195,4280 ; 3197.5,4280 C13.2
pads on no net: IC1.5 IC1.6 IC1.14 J1.1 J2.1 J3.1 J4.1 P1.

## Other copper
Top Layer:
  region net +5V: 2705,3580 cw(c2725,3580) 2725,3600 2890,3600 cw(c2890,3585) 2905,3585 2905,3555 cw(c2890,3555) 2890,3540 2710,3540 cw(c2710,3550) 2700,3550 2700,3580 cw(c2720,3580) 2720,3600
  region net +5V: 2600,3100 ccw(c2600,3085) 2585,3085 2585,3070 ccw(c2595,3070) 2595,3060 2655,3060 ccw(c2655,3070) 2665,3070 2665,3085 ccw(c2650,3085) 2650,3100
  region net GND: 2340,4135 2360,4115 2510,4115 2525,4100 2525,4120 2510,4135
  region net GND: 2630,4140 2687.14,4140 2710,4113.95 2710,3988.33 2716.25,3980 2740,3980 2750,3970 2750,3941.67 2758.75,3930 2800,3930 2810,3920 2810,3735 2815,3730 2875,3730 2880,3735 2880,3940 2880,3950 2870,3960 2790,3960 2780,3970 2780,4204 2766.25,4215 2615,4215 2605,4225 2605,4245 2595,4250 2568.09,4250 2560,4250 2555,4245 2555,4240 2555,4205 2555,4165 2540,4150 2440,4150 2420,4170 2420,4195 2405,4210 2335,4210 2325,4200 2325,4150 2340,4135 2510,4135 2525,4120 2525,4050 2540,4035 2600,4035 2615,4050 2615,4125
  region net +5V: 2635,4230 2695,4230 2705,4240 2705,4280 2700,4285 2470,4285 2460,4275 2460,4240 2465,4235 2515,4235 2525,4245 2525,4260 2530,4265 2620,4265 2630,4255 2630,4235
  region net +5V: 2345,3200 2345,3175 2355,3165 2460,3165 2465,3170 2465,3175 2465,3205
  region net +5V: 2070,4200 2070,4150 2080,4140 2155,4140 2165,4150 2165,4275 2158.33,4285 2040,4285 2030,4280
  region net +5V: 2030,4280 2020,4270 2020,4225 2030,4210 2060,4210 2070,4200
  region net +5V: 2155,3150 2140,3135 2140,2890 2155,2875 2210,2875 2230,2890 2230,3140 2220,3150
  region net +5V: 2345,3200 2355,3190 2450,3190 2465,3205 2465,3551.67 2452.5,3560 2370,3560 2366.02,3556.02 2366.02,3550 2366.02,3543.98 2370,3540 2375,3540 2430,3540 2440,3533.33 2440,3433.33 2430,3420 2385,3420 2375,3410 2375,3280 2372.5,3275 2355,3275 2345,3265
  pour cut-out: 2318.47,3588.47 2325,3595 2318.34,3595
  region net GND: 2327.93,3595 2425,3595 2430,3600 2430,3605 2425,3610 2310,3610 2295,3595 2295,3555 2280,3540 2185,3540 2170,3530 2170,3215 2190,3195 2305,3195 2320,3202.5 2320,3280 2310,3290 2265,3290 2255,3300 2255,3490 2260,3500 2305,3500 2320,3515 2325,3525 2327,3580.03
  region net GND: 2780,4180 2905,4180 2915,4170 2915,4150 2925,4140 2990,4140 3000,4150 3000,4185 2981.29,4203.71 2780,4203.71
  region net +5V: 2810,4050 2800,4043.33 2800,3982.5 2805,3980 2801.67,3980 2995,3980 3005,3990 3005,4015 2995,4025 2870,4025 2865,4030 2865,4045 2860,4050
  region net VOL: 2235,4035 2235,4005 2225,3995 2215,3995
  region net VOL: 2060,4020 2075,4030 2175,4030 2185,4040 2185,4075 2190,4085 2225,4085 2235,4075 2235,4035 2215,3995 2070,3995 2060,4000
  region net Vref: 1875,4180 1860,4165 1860,4105 1875,4090 1955,4090 1965,4105 1965,4170 1955,4180
Bottom Layer:
  region net +5V: 2140,3080 2140,3165 cw(c2165,3165) 2165,3190 2525,3190 cw(c2525,3165) 2550,3165 2550,3084.73 cw(c2515,3085) 2515,3050 2170,3050 cw(c2170,3080)

## Silkscreen, mask and mechanical layers (free items; w line width, h text height)
Bottom Overlay:
  lines w15.75: 2950,2295 3385,2295 3385,2395 3315,2395 3010,2395 2950,2395 2950,2295
  text "Designed by vit" at 2970,2326.32 h60